# Altium PCB motor_borad.PcbDoc
Units mil, origin at the board's own origin, x right, y up, seen from the top; angles counter-clockwise.
Board outline 3900 x 3850 mil, 2 copper layers (Top Layer, Bottom Layer); 46 components, 103 nets, 394 pads, 120 vias.
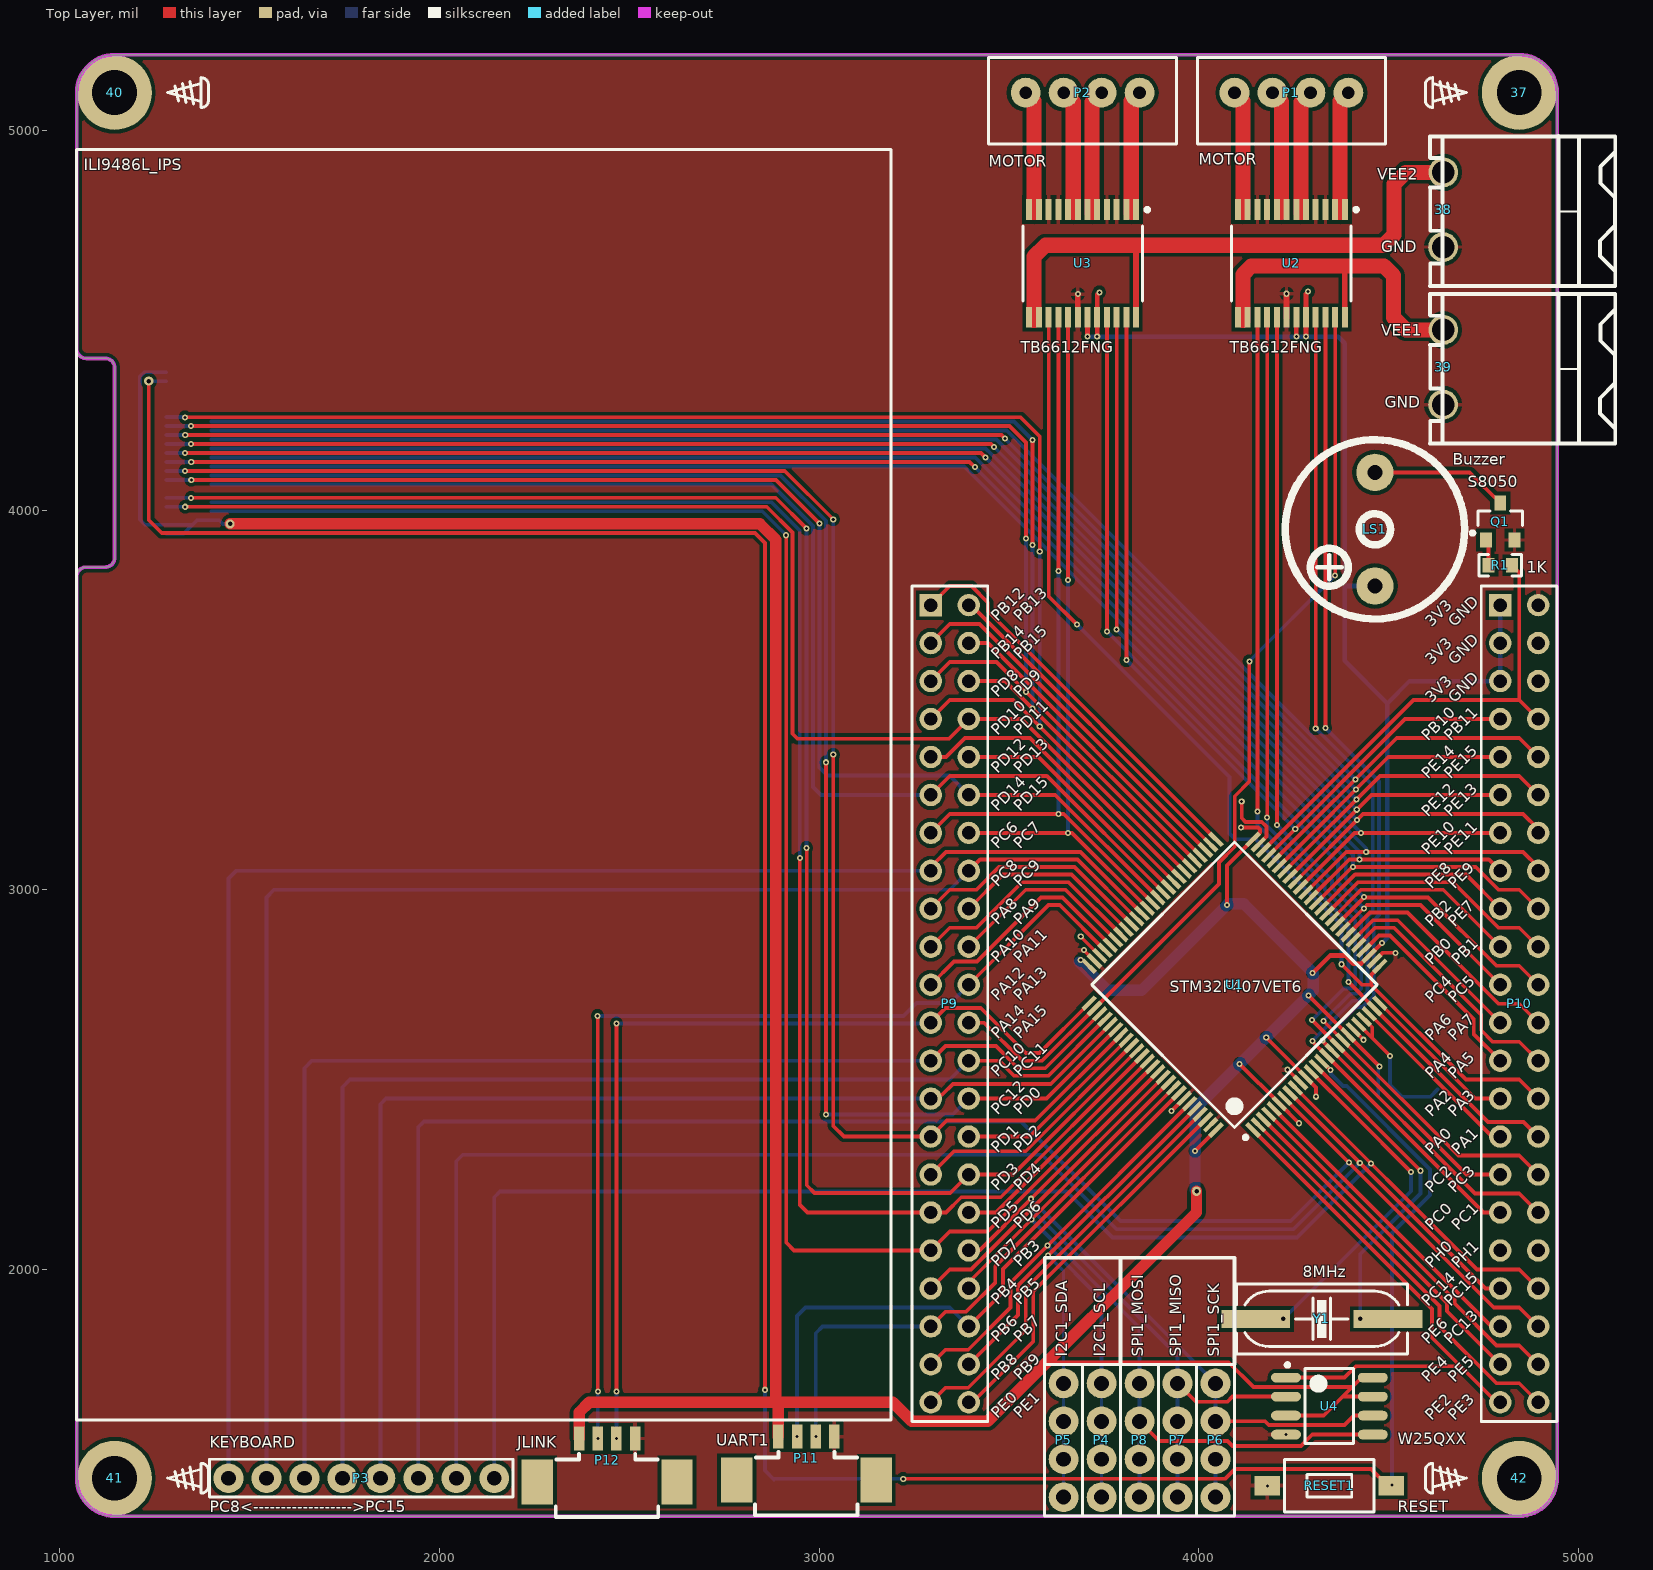
[diagram p0: Top Layer view]
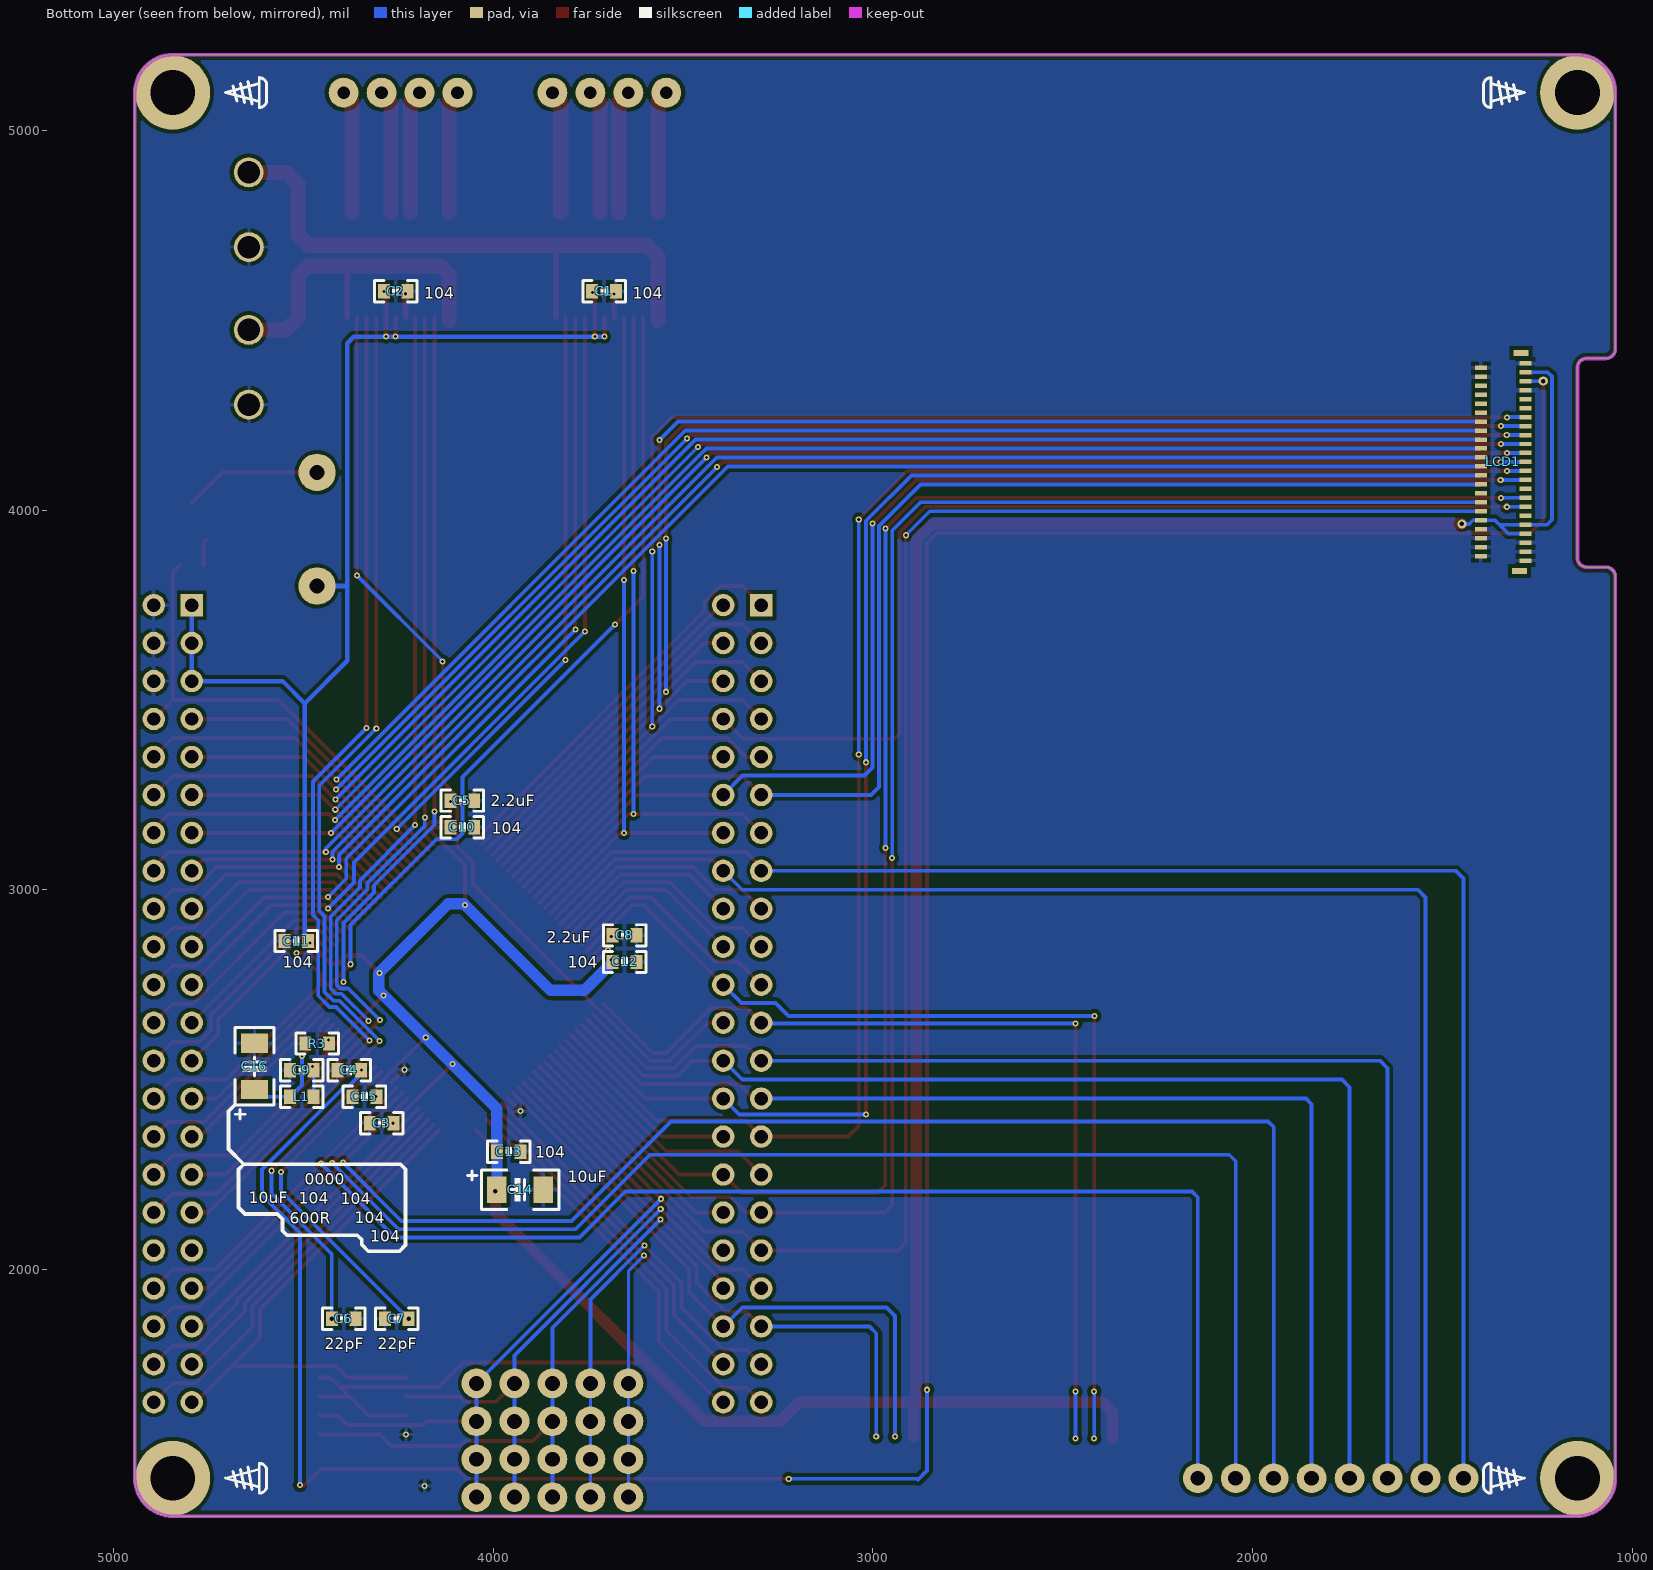
[diagram p1: Bottom Layer view, seen from below]

## Layer stack, top to bottom
Top Solder: solder mask 0.4, Solder Resist, Dk 3.5
Top Layer: signal copper 1.4
Dielectric 1: dielectric 12.6, FR-4, Dk 4.8
Bottom Layer: signal copper 1.4
Bottom Solder: solder mask 0.4, Solder Resist, Dk 3.5

## Board outline
1044,1450 1044,3825 cw(c1069,3825) 1069,3850 1119,3850 ccw(c1119,3875) 1144,3875 1144,4375 ccw(c1119,4375) 1119,4400 1069,4400 cw(c1069,4425) 1044,4425 1044,5100 cw(c1144,5100) 1144,5200 4844,5200 cw(c4844,5100) 4944,5100 4944,1450 cw(c4844,1450) 4844,1350 1144,1350 cw(c1144,1450)

## Design rules (kind name [scope] priority, off if disabled: settings)
Clearance Clearance_Polygon [InPolygon] p1: gap=10
Clearance [All] p2: gap=4
ComponentClearance [All] p1 off: gap=10 collisioncheckmode=3 verticalgap=10 showdistances=FALSE
PolygonConnect PolygonConnect_Polygon [InPolygon] p1: connectstyle=Direct reliefconductorwidth=10 reliefentries=4 polygonreliefangle="90 Angle" airgapwidth=10
PolygonConnect [All] p2: connectstyle=Relief reliefconductorwidth=10 reliefentries=4 polygonreliefangle="90 Angle" airgapwidth=10
RoutingTopology RoutingTopology_POWER [InNet('VCC')and InNet('GND')] p1: topology=Starburst
RoutingTopology [All] p2: topology=Shortest
RoutingVias [All] p1: holewidth=8 width=16 viastyle="Through Hole" minholewidth=8 minwidth=16 maxholewidth=28 maxwidth=50
SolderMaskExpansion [All] p1: expansion=4
Width [All] p1: maxlimit=50 minlimit=6 preferedwidth=10
28 further rules are at their usual default settings.

## Classes and differential pairs
component class stm32f407: C1 C2 C3 C4 C5 C6 C7 C8 C9 C10 C11 C12 C13 C14 C15 C16 L1 LCD1 LS1 P1 P2 P3 P4 P7 P8 P9 P10 P11 P12 Q1 R1 R3 RESET1 U1 U2 U3 U4 Y1

## Components (designator, comment, footprint, x,y, rotation, side; value= is the part's Value field where it differs from the comment)
37 "Comment" "Screw Hole" 4844,5100 r90 top
38 "Comment" KF2EDGK_2P 4644,4890 r270 top
39 "Comment" KF2EDGK_2P 4644,4475 r270 top
40 "Comment" "Screw Hole" 1144,5100 r270 top
41 "Comment" "Screw Hole" 1144,1450 r270 top
42 "Comment" "Screw Hole" 4844,1450 r90 top
C1 "104" C_0603 3708,4577 r0 bottom
C2 "104" C_0603 4257,4577 r0 bottom
C3 "104" C_0603 4294,2385 r180 bottom
C4 "104" C_0603 4379,2525 r180 bottom
C5 "2.2uF" C_0603 4081,3235 r180 bottom
C6 "22pF" C_0603 4394,1870 r0 bottom
C7 "22pF" C_0603 4254,1870 r180 bottom
C8 "2.2uF" C_0603 3654,2880 r180 bottom
C9 "104" C_0603 4504,2525 r180 bottom
C10 "104" C_0603 4081,3165 r0 bottom
C11 "104" C_0603 4519,2865 r180 bottom
C12 "104" C_0603 3654,2810 r0 bottom
C13 "104" C_0603 3959,2310 r0 bottom
C14 "10uF" TAC_3216 3929,2210 r180 bottom
C15 "104" C_0603 4339,2455 r180 bottom
C16 "10uF" TAC_3216 4629,2535 r90 bottom
L1 "600R" R_0603 4504,2455 r180 bottom
LCD1 "ILI9486L_IPS" ili9486l_裸屏 1044,4950 r0 top locked
LS1 "Buzzer" BEEP 4464,3950 r90 top
P1 "MOTOR" XH_4 4244,5100 r180 top
P2 "MOTOR" XH_4 3694,5100 r180 top
P3 "PC8<------------------>PC15" PIN_8 1794,1450 r0 top
P4 "I2C1_SCL" PIN_4 3744,1550 r90 top
P5 "I2C1_SDA" PIN_4 3644,1550 r90 top
P6 "SPI1_SCK" PIN_4 4044,1550 r90 top
P7 "SPI1_MISO" PIN_4 3944,1550 r90 top
P8 "SPI1_MOSI" PIN_4 3844,1550 r90 top
P9 "Header 22X2" HDR2X22 3294,3750 r270 top
P10 "Header 22X2" HDR2X22 4794,3750 r270 top
P11 "UART1" 1.25mm_4P 2969,1455 r0 top
P12 "JLINK" 1.25mm_4P 2444,1450 r0 top
Q1 "S8050" SOT_23_3 4794,3970 r0 top
R1 "1K" R_0603 4794,3855 r0 top
R3 "0000" R_0603 4464,2595 r180 bottom
RESET1 "RESET" "micro button_2_SMD" 4344,1430 r180 top
U1 "STM32F407VET6" LQFP100_V 4094,2750 r135 top locked
U2 "TB6612FNG" SSOP24 4244,4650 r270 top
U3 "TB6612FNG" SSOP24 3694,4650 r270 top
U4 "W25QXX" SOIC_8 4344,1640 r0 top
Y1 "8MHz" Crystal_HC_49USMD 4324,1870 r0 top

## Footprints (in the part's own frame and the unit in brackets; to place one, negate y for a bottom-side part, rotate by r counter-clockwise, add the part's x,y. Pads: shape width x height; smd on the part's side, far side on the other; paste and mask are expansions set on the pad)
1.25mm_4P [mm] "贴片卧式端子"
  rect 0.7x1.6 smd: 1(-1.942,2.658) 2(-0.692,2.658) 3(0.558,2.658) 4(1.808,2.658)
  rect 2.1x3 smd: 5(-4.742,-0.242) 5(4.608,-0.242)
  silkscreen extent -3.5,-2.6 3.35,1.63
BEEP [mm]
  round 2.5 hole 1: 1(-3.8,0) 2(3.8,0)
  silkscreen extent -6.01,-6 5.99,6, body extent -6,-6 6,6, height 9.61
C_0603 [mm]
  rect 0.8x0.96 smd: 1(-0.79,0) 2(0.79,0)
  silkscreen extent -1.42,-0.71 1.42,0.71, body extent -0.76,-0.39 0.76,0.39, height 0.9
Crystal_HC_49USMD [mm]
  rect 4.6x1.2 smd: 1(-4.428,0) 2(4.428,0)
  silkscreen extent -5.72,-2.36 5.72,2.34, body extent -6.1,-2.4 6.1,2.4, height 2.81
HDR2X22 [mm] "Connector; Header; 22x2 Position"
  rect 1.5x1.5 hole 0.9: 1(0,0)
  round 1.5 hole 0.9: 2(0,2.54) 3(2.54,0) 4(2.54,2.54) 5(5.08,0) 6(5.08,2.54) 7(7.62,0) 8(7.62,2.54) 9(10.16,0) 10(10.16,2.54) 11(12.7,0) 12(12.7,2.54) 13(15.24,0) 14(15.24,2.54) 15(17.78,0) 16(17.78,2.54) 17(20.32,0) 18(20.32,2.54) 19(22.86,0) 20(22.86,2.54) 21(25.4,0) 22(25.4,2.54) 23(27.94,0) 24(27.94,2.54) 25(30.48,0) 26(30.48,2.54) 27(33.02,0) 28(33.02,2.54) 29(35.56,0) 30(35.56,2.54) 31(38.1,0) 32(38.1,2.54) 33(40.64,0) 34(40.64,2.54) 35(43.18,0) 36(43.18,2.54) 37(45.72,0) 38(45.72,2.54) 39(48.26,0) 40(48.26,2.54) 41(50.8,0) 42(50.8,2.54) 43(53.34,0) 44(53.34,2.54)
  silkscreen extent -1.27,-1.27 54.61,3.81
ili9486l_裸屏 [mm]
  rect 1x0.4 smd far side: 0(6.3,-13.6) 0(6.4,-28.2)
  rect 0.8x0.3 smd far side: 1(6,-27.5) 2(9,-27.2) 3(6,-26.9) 4(9,-26.6) 5(6,-26.3) 6(9,-26) 7(6,-25.7) 8(9,-25.4) 9(6,-25.1) 10(9,-24.8) 11(6,-24.5) 12(9,-24.2) 13(6,-23.9) 14(9,-23.6) 15(6,-23.3) 16(9,-23) 17(6,-22.7) 18(9,-22.4) 19(6,-22.1) 20(9,-21.8) 21(6,-21.5) 22(9,-21.2) 23(6,-20.9) 24(9,-20.6) 25(6,-20.3) 26(9,-20) 27(6,-19.7) 28(9,-19.4) 29(6,-19.1) 30(9,-18.8) 31(6,-18.5) 32(9,-18.2) 33(6,-17.9) 34(9,-17.6) 35(6,-17.3) 36(9,-17) 37(6,-16.7) 38(9,-16.4) 39(6,-16.1) 40(9,-15.8) 41(6,-15.5) 42(9,-15.2) 43(6,-14.9) 44(9,-14.6) 45(6,-14.3)
  silkscreen extent 0,-85 54.5,0
KF2EDGK_2P [mm]
  round 2 hole 1.5: 1(0,0) 2(5,-0.013)
  silkscreen extent -2.43,-0.89 7.62,11.51
LQFP100_V [mm] "Thin QFP, 100-Leads, Body 14x14mm, Pitch 0.5mm, ST Recommended"
  rect 1.2x0.3 smd: 1(-7.75,6) 2(-7.75,5.5) 3(-7.75,5) 4(-7.75,4.5) 5(-7.75,4) 6(-7.75,3.5) 7(-7.75,3) 8(-7.75,2.5) 9(-7.75,2) 10(-7.75,1.5) 11(-7.75,1) 12(-7.75,0.5) 13(-7.75,0) 14(-7.75,-0.5) 15(-7.75,-1) 16(-7.75,-1.5) 17(-7.75,-2) 18(-7.75,-2.5) 19(-7.75,-3) 20(-7.75,-3.5) 21(-7.75,-4) 22(-7.75,-4.5) 23(-7.75,-5) 24(-7.75,-5.5) 25(-7.75,-6) 51(7.75,-6) 52(7.75,-5.5) 53(7.75,-5) 54(7.75,-4.5) 55(7.75,-4) 56(7.75,-3.5) 57(7.75,-3) 58(7.75,-2.5) 59(7.75,-2) 60(7.75,-1.5) 61(7.75,-1) 62(7.75,-0.5) 63(7.75,0) 64(7.75,0.5) 65(7.75,1) 66(7.75,1.5) 67(7.75,2) 68(7.75,2.5) 69(7.75,3) 70(7.75,3.5) 71(7.75,4) 72(7.75,4.5) 73(7.75,5) 74(7.75,5.5) 75(7.75,6)
  rect 0.3x1.2 smd: 26(-6,-7.75) 27(-5.5,-7.75) 28(-5,-7.75) 29(-4.5,-7.75) 30(-4,-7.75) 31(-3.5,-7.75) 32(-3,-7.75) 33(-2.5,-7.75) 34(-2,-7.75) 35(-1.5,-7.75) 36(-1,-7.75) 37(-0.5,-7.75) 38(0,-7.75) 39(0.5,-7.75) 40(1,-7.75) 41(1.5,-7.75) 42(2,-7.75) 43(2.5,-7.75) 44(3,-7.75) 45(3.5,-7.75) 46(4,-7.75) 47(4.5,-7.75) 48(5,-7.75) 49(5.5,-7.75) 50(6,-7.75) 76(6,7.75) 77(5.5,7.75) 78(5,7.75) 79(4.5,7.75) 80(4,7.75) 81(3.5,7.75) 82(3,7.75) 83(2.5,7.75) 84(2,7.75) 85(1.5,7.75) 86(1,7.75) 87(0.5,7.75) 88(0,7.75) 89(-0.5,7.75) 90(-1,7.75) 91(-1.5,7.75) 92(-2,7.75) 93(-2.5,7.75) 94(-3,7.75) 95(-3.5,7.75) 96(-4,7.75) 97(-4.5,7.75) 98(-5,7.75) 99(-5.5,7.75) 100(-6,7.75)
  silkscreen extent -7.87,-6.75 6.75,6.82, body extent -7,-7 7,7, height 1.6
"micro button_2_SMD" [mm]
  rect 1.7x1.3 smd: 1(-4.15,0) 2(4.15,0)
  silkscreen extent -3,-1.76 3,1.74, body extent -4.5,-1.75 4.5,1.75, height 4.51
PIN_4 [mm] "Connector; Header; 2 Position"
  round 2 hole 1: 1(-3.81,0) 2(-1.27,0) 3(1.27,0) 4(3.81,0)
  silkscreen extent -5.08,-1.27 5.08,1.27, body extent -5.08,-1.27 5.08,1.27, height 8.51
PIN_8 [mm]
  round 2 hole 1: 1(-8.89,0) 2(-6.35,0) 3(-3.81,0) 4(-1.27,0) 5(1.27,0) 6(3.81,0) 7(6.35,0) 8(8.89,0)
  silkscreen extent -10.16,-1.27 10.16,1.27, body extent -10.16,-1.27 10.16,1.27, height 8.51
R_0603 [mm]
  rect 0.8x0.96 smd: 1(-0.79,0) 2(0.79,0)
  silkscreen extent -1.42,-0.71 1.42,0.71, body extent -0.76,-0.38 0.76,0.38, height 0.41
"Screw Hole" [mm]
  round 5 hole 3: 1(0,0)
  silkscreen extent -1,3.54 1,6.29, body extent -2.6,-2.6 2.6,2.6, height 2.55
SOIC_8 [mm]
  oval 2x0.65 smd: 1(-2.906,1.905) 2(-2.906,0.635) 3(-2.906,-0.635) 4(-2.906,-1.905) 5(2.906,-1.905) 6(2.906,-0.635) 7(2.906,0.635) 8(2.906,1.905)
  silkscreen extent -2.93,-2.5 1.63,2.88, body extent -3,-2.5 3,2.5, height 1.8
SOT_23_3 [mm]
  rect 0.8x1 smd: 1(-0.95,-1.235) 2(0.95,-1.235) 3(0,1.235)
  silkscreen extent -1.98,-0.89 1.5,0.7, body extent -1.45,-1.19 1.45,1.19, height 1.02
SSOP24 [mm] "TSOP, 24-Leads, Body 7.80x5.60mm, Pitch 0.65mm, Thermal Pad 6.30x4.30mm, IPC Medium Density"
  rect 1.4x0.4 smd: 1(-3.6,3.575) 2(-3.6,2.925) 3(-3.6,2.275) 4(-3.6,1.625) 5(-3.6,0.975) 6(-3.6,0.325) 7(-3.6,-0.325) 8(-3.6,-0.975) 9(-3.6,-1.625) 10(-3.6,-2.275) 11(-3.6,-2.925) 12(-3.6,-3.575) 13(3.6,-3.575) 14(3.6,-2.925) 15(3.6,-2.275) 16(3.6,-1.625) 17(3.6,-0.975) 18(3.6,-0.325) 19(3.6,0.325) 20(3.6,0.975) 21(3.6,1.625) 22(3.6,2.275) 23(3.6,2.925) 24(3.6,3.575)
  silkscreen extent -3.72,-4 2.5,4.45, body extent -2.9,-4 2.9,4, height 1.6
TAC_3216 [mm]
  rect 1.3x1.8 smd: 1(-1.55,0) 2(1.55,0)
  silkscreen extent -3.52,-1.31 2.59,1.31, body extent -1.75,-0.8 1.75,0.8, height 1.6
XH_4 [mm]
  round 2 hole 0.85: 1(-3.81,0) 2(-1.27,0) 3(1.27,0) 4(3.81,0)
  silkscreen extent -6.29,-2.35 6.29,3.45, body extent -6.29,-2.35 6.29,3.45, height 7.2

## Part data
C1 C2 C3 C4 C5 C6 C7 C8 C9 C10 C11 C12 C13 C15: library part Cap, "Capacitor"
C14 C16: library part "Cap Pol1", "Polarized Capacitor (Radial)"
L1: library part Inductor, "Inductor"
LCD1: library part TFT_3.5_Tiky_ODM
LS1: "Magnetic Transducer Buzzer"
P1 P2 P4 P5 P6 P7 P8 P11 P12: library part "Header 4", "Header, 4-Pin"
P3: library part "Header 8", "Header, 8-Pin"
P9 P10: "Header, 22-Pin, Dual row"
Q1: library part QNPN, "NPN Bipolar Transistor"
R1 R3: library part Res2, "Resistor"
RESET1: library part SW-PB, "Switch"
U1: "ARM Cortex-M4 32b MCU+FPU, 210DMIP, 512 kB Flash, 192+4 kB RAM, Camera, 82 I/Os, 100-pin LQFP, -40 to +85癈, Tray"
U2 U3: "DC_MOTOR_DRIVER"
U4: library part W25X16, "W25X16;SST25VF016;MX25L1605"
Y1: library part XTAL, "Crystal Oscillator"

## Via types
v1: diameter 16, hole 8, Top Layer to Bottom Layer, 115 vias
v2: diameter 24, hole 12, Top Layer to Bottom Layer, 3 vias
v3: diameter 20, hole 12, Top Layer to Bottom Layer, 2 vias

## Nets (pads, with @x,y where several pads share a name; then routed paths per layer and width w, separated by ;. In a path a pad name is that pad's centre, name@x,y a point inside that pad or via, vN(x,y) a via of type N, cw(c..) or ccw(c..) an arc to the next point about the centre after c; other vN are vias at no path point)
BEEP: P10.8 R1.2 U1.48 | length 1270.6
  Top Layer w10: U1.48 4565.61,3500 4844,3500 ; R1.2 4844,3836.1 4844,3500 ; P10.8 4844,3500
FLASH_CS: P10.43 U1.1 U4.1 | length 1464.7
  Top Layer w10: U1.1 4614,1895.93 4614,1820 4689,1745 ; U4.1 4384,1715 4414,1745 4689,1745 ; P10.43 4784,1650 4689,1745
FSMC_D0: LCD1.18 P9.11 U1.61 | length 3396.7
  Top Layer w10: P9.11 3344,3300 3599.68,3300 U1.61
  Bottom Layer w10: LCD1.18 2873.93,4068.11 2984,3958.04 2984,3271 3005,3250 P9.11
FSMC_D1: LCD1.19 P9.12 U1.62 | length 3444.3
  Top Layer w10: v1(1345.92,4079.92) 2886.08,4079.92 v1(3001,3965) ; P9.12 3621.84,3250 U1.62
  Bottom Layer w10: LCD1.19 v1(1345.92,4079.92) ; v1(3001,3965) 3001,3322 3022,3301 3343,3301 P9.12
FSMC_D2: LCD1.20 P9.28 U1.81 | length 4088.8
  Top Layer w10: v1(3018,2408) v1(3018,3336) ; P9.28 3599.13,2450 U1.81
  Bottom Layer w10: LCD1.20 2898.31,4091.73 3018,3972.04 v1(3018,3336) ; v1(3018,2408) 3352,2408 P9.28
FSMC_D3: LCD1.21 P9.29 U1.82 | length 4287.9
  Top Layer w10: v1(1329.54,4103.54) 2909.46,4103.54 v1(3037,3976) ; v1(3037,3356) 3037,2378 3065,2350 P9.29 3336,2392 3568.97,2392 U1.82
  Bottom Layer w10: LCD1.21 v1(1329.54,4103.54) ; v1(3037,3356) v1(3037,3976)
FSMC_D4: LCD1.22 P10.18 U1.38 | length 4132.1
  Top Layer w10: U1.38 4404,3060 v1(4406,3060) 4729.51,3060 4789.51,3000 4844,3000 P10.18
  Bottom Layer w10: LCD1.22 3382.12,4115.35 4406,3091.48 v1(4406,3060)
FSMC_D5: LCD1.23 P10.15 U1.39 | length 4140.6
  Top Layer w10: v1(1345.83,4127.17) 3396.17,4127.17 v1(3410,4113.33) ; U1.39 4396.16,3080 v1(4423,3080) 4764,3080 P10.15
  Bottom Layer w10: LCD1.23 v1(1345.83,4127.17) ; v1(3410,4113.33) 4423,3100.33 v1(4423,3080)
FSMC_D6: LCD1.24 P10.16 U1.40 | length 4161
  Top Layer w10: U1.40 4388.32,3100 v1(4441,3100) 4854,3100 4894,3060 P10.16
  Bottom Layer w10: LCD1.24 3411.02,4138.98 4441,3109 v1(4441,3100)
FSMC_D7: LCD1.25 P10.13 U1.41 | length 4146.4
  Top Layer w10: v1(1329.21,4150.79) 3426.21,4150.79 v1(3438,4139) ; U1.41 4410.48,3150 v1(4427,3150) P10.13
  Bottom Layer w10: LCD1.25 v1(1329.21,4150.79) ; v1(3438,4139) v1(4427,3150)
FSMC_D8: LCD1.26 P10.14 U1.42 | length 4164.5
  Top Layer w10: U1.42 4432.64,3200 4854,3200 4894,3160 P10.14
  Bottom Layer w10: LCD1.26 3438.44,4162.6 3455,4146.04 ; 3455,4146 v1(4417,3184)
FSMC_D9: LCD1.27 P10.11 U1.43 | length 4177.6
  Top Layer w10: v1(1345.59,4174.41) 3452.59,4174.41 v1(3461,4166) ; U1.43 4454.81,3250 P10.11
  Bottom Layer w10: LCD1.27 v1(1345.59,4174.41) ; v1(3461,4166) v1(4416,3211)
FSMC_D10: LCD1.28 P10.12 U1.44 | length 4201.8
  Top Layer w10: U1.44 4476.97,3300 4844,3300 P10.12
  Bottom Layer w10: LCD1.28 3466.78,4186.22 v1(4415,3238)
FSMC_D11: LCD1.29 P10.9 U1.45 | length 4221.2
  Top Layer w10: v1(1330,4198) 3480,4198 v1(3489,4189) ; U1.45 4499.13,3350 P10.9
  Bottom Layer w10: LCD1.29 v1(1330,4198) ; v1(3489,4189) v1(4414,3264)
FSMC_D12: LCD1.30 P10.10 U1.46 | length 4245.3
  Top Layer w10: U1.46 4521.29,3400 4844,3400 P10.10
  Bottom Layer w10: LCD1.30 3494.16,4209.84 v1(4413,3291)
FSMC_D13: LCD1.31 P9.5 U1.55 | length 3872.1
  Top Layer w10: v1(1345.65,4221.65) 3501.35,4221.65 3545,4178 v1(3545,3925) ; P9.5 3344,3600 3466.71,3600 v1(3545,3521.71) U1.55
  Bottom Layer w10: LCD1.31 v1(1345.65,4221.65) ; v1(3545,3521.71) v1(3545,3925)
FSMC_D14: LCD1.32 P9.6 U1.56 | length 3675.3
  Top Layer w10: P9.6 3489.25,3550 3975.68,3063.57 U1.56 ; v1(3562,3908) v1(3562,4185)
  Bottom Layer w10: LCD1.32 3513.54,4233.46 v1(3562,4185) ; v1(3562,3477) v1(3562,3908)
FSMC_D15: LCD1.33 P9.7 U1.57 | length 3961
  Top Layer w10: v1(1329.28,4244.72) 3530.28,4244.72 3581,4194 v1(3581,3891) ; P9.7 3344,3500 3511.03,3500 U1.57
  Bottom Layer w10: LCD1.33 v1@1329.28,4245.28 ; v1(3581,3430) v1(3581,3891)
GND: 38.2 39.2 C1.1 C2.1 C3.1 C4.1 C5.2 C6.1 C7.1 C8.2 C9.1 C10.1 C11.1 C12.1 C13.1 C14.2 C15.1 C16.2 LCD1.1 LCD1.2 LCD1.3 LCD1.4 LCD1.5 LCD1.6 LCD1.8 LCD1.39 LCD1.42 LCD1.44 LCD1.45 P10.2 P10.4 P10.6 P11.4 P12.4 Q1.2 R3.1 RESET1.2 U1.10 U1.27 U1.74 U1.94 U1.99 U2.3 U2.4 U2.9 U2.10 U2.18 U3.3 U3.4 U3.9 U3.10 U3.18 U4.4 | length 326.7
  Top Layer w10: v1(3697,2841) 3697,2840.77 U1.74 ; v1(3928.03,2417) U1.94 ; v1(4234,2526) 4234.48,2526 U1.10 ; U1.27 4484.23,2834 v1(4518,2834)
  Top Layer w15: U3.18 v1(3681.2,4569.2) ; U2.18 v1(4231.2,4570.2)
  Bottom Layer w15: v1(3681.2,4569.2) 3682,4570 C1.1@3682,4571.9 ; v1(4231.2,4570.2) 4232,4571 C2.1@4231.9,4571
  other v1: 4180.61,1430 4229.57,1565
I2C1_SCL: P4.1 P4.2 P4.3 P4.4 P9.41 U1.95 | length 1726.2
  Top Layer w10: P9.41 3332.53,1788.53 3392.53,1788.53 3504,1900 3504,1965.13 v1(3601.87,2063) U1.95
  Bottom Layer w8: P4.1 P4.2 P4.3 P4.4
  Bottom Layer w10: v1(3601.87,2063) 3744,1920.87 P4.4
I2C1_SDA: P5.1 P5.2 P5.3 P5.4 P9.42 U1.96 | length 1572.9
  Top Layer w10: P9.42 3524,1880 3524,1957.29 U1.96
  Bottom Layer w8: v1(3603,2036.29) 3644,1995.29 P5.4 P5.3 P5.2 P5.1
LCD_CS: LCD1.12 P9.35 U1.88 | length 4578.4
  Top Layer w10: v1(2913,3934) 2913,2071 2934,2050 P9.35 3344,2100 3444,2100 U1.88
  Bottom Layer w10: LCD1.12 2849.76,3997.24 v1(2913,3934)
LCD_RD: LCD1.15 P9.32 U1.85 | length 4475.9
  Top Layer w10: v1(1345.68,4032.68) 2885.32,4032.68 v1(2966.5,3951.5) ; v1@2967,3110.5 2967,2222 2988,2201 3345,2201 P9.32 ; P9.32@3401,2250 3510.48,2250 U1.85
  Bottom Layer w10: LCD1.15 v1(1345.68,4032.68) ; v1(2966.5,3110.5) v1(2966.5,3951.5)
LCD_RS: LCD1.13 P9.8 U1.58 | length 3424.5
  Top Layer w10: v1(1329.94,4009.06) 2861.99,4009.06 2930,3941.04 2930,3411 2943,3398 3342,3398 P9.8 3533.19,3450 U1.58
  Bottom Layer w10: LCD1.13 v1(1329.94,4009.06)
LCD_WR: LCD1.14 P9.33 U1.86 | length 4438.1
  Top Layer w10: v1(2949,3084) 2949,2170 2969,2150 P9.33 3334,2150 3374,2190 3478.32,2190 U1.86
  Bottom Layer w10: LCD1.14 2874.13,4020.87 2949,3946 v1(2949,3084)
M1_IN1: P10.33 U1.15 U2.21 | length 2726.6
  Top Layer w10: v1(4299,2601.96) 4299,2600.68 U1.15 4749.68,2150 P10.33 ; v1(4307.98,3425.02) U2.21
  Bottom Layer w10: v1(4299,2601.96) 4405.04,2708 4421,2708 4444,2731 4444,2930 4458,2944 4458,3275 v1(4307.98,3425.02)
M1_IN2: P10.34 U1.16 U2.22 | length 2792
  Top Layer w10: v1(4326,2603) 4326,2601.52 U1.16 4727.52,2200 4844,2200 P10.34 ; v1(4333.57,3426.43) U2.22
  Bottom Layer w10: v1(4326,2603) 4414,2691 4431,2691 4461,2721 4461,2920 4475,2934 4475,3285 v1(4333.57,3426.43)
M2_IN1: P10.32 U1.18 U2.17 | length 2729.3
  Top Layer w10: v1(4205.61,3170.39) U2.17 ; v1(4328,2655) 4379.15,2603.85 U1.18 4683.19,2300 4844,2300 P10.32
  Bottom Layer w10: v1(4205.61,3170.39) 4351,3025 4351,3007 4428,2930 4428,2740 4414,2726 4399,2726 v1(4328,2655)
M2_IN2: P10.31 U1.17 U2.16 | length 2672
  Top Layer w10: v1(4180.02,3190.98) U2.16 ; v1(4298,2657) 4365.07,2589.93 U1.17 4705.36,2250 P10.31
  Bottom Layer w10: v1(4180.02,3190.98) 4180.02,3168.98 4332,3017 4332,3000 4412,2920 4412,2749 4403,2740 4382,2740 4299,2657 v1(4298,2657)
M3_IN1: P10.21 U1.33 U3.21 | length 2353.6
  Top Layer w10: v1(3757.98,3681.02) U3.21 ; U1.33 v1@4434.6,2951.4 ; 4443.19,2960 4584,2960 P10.21
  Bottom Layer w10: v1(3757.98,3681.02) 4367,3072 4367,3019 v1(4435,2951)
M3_IN2: P10.22 U1.34 U3.22 | length 2450.4
  Top Layer w10: v1(3783.57,3685.57) U3.22 ; U1.34 4435.36,2980 4604,2980 4784,2800 4844,2800 P10.22
  Bottom Layer w10: v1(3783.57,3685.57) 4387,3082.13 4387,3029 v1(4435.36,2980.64)
M4_IN1: P9.14 U1.64 U3.17 | length 1911.3
  Top Layer w10: P9.14 3666.16,3150 U1.64 ; v1(3655.61,3816.39) U3.17
  Bottom Layer w10: v1(3655.61,3149.39) v1(3655.61,3816.39)
M4_IN2: P9.13 U1.63 U3.16 | length 2010.2
  Top Layer w10: P9.13 3344,3200 3644,3200 U1.63 ; v1(3630.02,3840.02) U3.16
  Bottom Layer w10: v1(3630.02,3200.02) v1(3630.02,3840.02)
NetC5_1: C5.1 U1.49 | length 175.1
  Top Layer w10: v1(4113,3233) 4113,3189 4123,3179 4166,3179 4178,3167 4178,3140.23 U1.49
NetC6_2: C6.2 U1.13 Y1.2 | length 843.7
  Top Layer w10: U1.13 v1(4584,2260)
  Bottom Layer w10: v3(4425.1,1870) 4425.1,2041.1 4584,2200 v1(4584,2260)
NetC7_2: C7.2 U1.12 Y1.1 | length 898.6
  Top Layer w10: U1.12 4295.83,2520.17 4404,2412 v1(4559,2257)
  Bottom Layer w10: v3(4222.9,1870) 4559,2206.1 v1(4559,2257)
NetC8_1: C8.1 U1.73 | length 78.1
  Top Layer w10: v1(3689,2876.61) U1.73
  Bottom Layer w10: C8.1 3689,2880 v1(3689,2876.61)
NetC16_1: C16.1 L1.1 U1.21 U1.22 | length 398.1
  Top Layer w10: U1.21 4456.71,2610 ; U1.22 4456.71,2637.84 4456.71,2610 ; v1(4504,2562.71) 4456.71,2610
  Bottom Layer w10: v1(4504,2562.71) 4504,2486.1 L1.1 4610.04,2455 C16.1
NetLS1_2: LS1.2 Q1.3 | length 363.5
  Top Layer w10: LS1.2 4713.02,4099.61 Q1.3
NetP1_1: P1.1 U2.1 U2.2 | length 325.1
  Top Layer w40: 4372,4784 4372,5078 P1.1
NetP1_2: P1.2 U2.5 U2.6 | length 326.4
  Top Layer w40: 4269,4784 4269,5075 P1.2
NetP1_3: P1.3 U2.7 U2.8 | length 325.9
  Top Layer w40: P1.3 4218,5076 4218,4784
NetP1_4: P1.4 U2.11 U2.12 | length 325.1
  Top Layer w40: P1.4 4116,5078 4116,4784
NetP2_1: P2.1 U3.1 U3.2 | length 325.1
  Top Layer w40: 3822,4784 3822,5078 P2.1
NetP2_2: P2.2 U3.5 U3.6 | length 326.4
  Top Layer w40: 3719,4784 3719,5075 P2.2
NetP2_3: P2.3 U3.7 U3.8 | length 326.4
  Top Layer w40: P2.3 3669,5075 3669,4784
NetP2_4: P2.4 U3.11 U3.12 | length 325.1
  Top Layer w40: P2.4 3566,5078 3566,4784
NetQ1_1: Q1.1 R1.1 | length 69
  Top Layer w10: Q1.1 4762.9,3915.08 R1.1
NetR3_2: R3.2 U1.20 | length 38
  Top Layer w10: U1.20 4434,2604.87 v1(4434,2605)
PA0: P10.29 U1.23 | length 479
  Top Layer w10: U1.23 4772.39,2350 P10.29
PA1: P10.30 U1.24 U2.15 | length 2519.5
  Top Layer w10: v1(4154.43,3206.43) U2.15 ; v1(4394,2757) 4462.86,2688.14 U1.24 4761.7,2388.53 4855.47,2388.53 P10.30
  Bottom Layer w10: v1(4154.43,3206.43) 4154.43,3171.57 4314,3012 4314,2993 4394,2913 v1(4394,2757)
PA2: P10.27 U1.25 | length 421.3
  Top Layer w10: U1.25 4728.07,2450 P10.27
PA3: P10.28 U1.26 U3.15 | length 2777.9
  Top Layer w10: U3.15 3604.43,3773.57 v1(3679,3699) ; v1(4376,2804) 4430,2750 4454,2750 ; U1.26 4454,2775.93 4454,2750 ; P10.28 4844,2500 4704,2500 4454,2750
  Bottom Layer w10: v1(3679,3699) 4081,3297 4081,3148.73 4096.73,3133 4150,3133 4376,2907 v1(4376,2804)
PA4: P10.25 U1.29 | length 535.5
  Top Layer w10: U1.29 4474.55,2880 4504,2880 4724,2660 4724,2620 P10.25
PA5: P10.26 U1.30 | length 661.7
  Top Layer w10: U1.30 4421.11,2856.91 4464.2,2900 4514,2900 4744,2670 4744,2630 4774,2600 4844,2600 P10.26
PA6: P10.23 U1.31 | length 520.1
  Top Layer w10: U1.31 4458.87,2920 4524,2920 P10.23
PA7: P10.24 U1.32 | length 644.8
  Top Layer w10: U1.32 4451.03,2940 4549.51,2940 4789.51,2700 4844,2700 P10.24
PA8: P9.17 U1.67 | length 636.2
  Top Layer w10: P9.17 3344,3000 3414,3000 3474,3060 3672.64,3060 U1.67
PA9: P9.18 U1.68 | length 511.5
  Top Layer w10: P9.18 3484,3040 3664.81,3040 U1.68
PA10: P9.19 U1.69 | length 628.2
  Top Layer w10: P9.19 3344,2900 3414,2900 3534,3020 3656.97,3020 U1.69
PA11: P9.20 U1.70 | length 503.5
  Top Layer w10: P9.20 3544,3000 3649.13,3000 U1.70
PA12: P9.21 U1.71 | length 620.2
  Top Layer w10: P9.21 3355.47,2811.47 3415.47,2811.47 3584,2980 3641.29,2980 U1.71
PA13: P9.22 P12.2 U1.72 | length 2621.1
  Top Layer w10: v1(2416,2668) 2416.76,2667.24 v1(2416.76,1678.76) ; P9.22 3604,2960 3633.45,2960 U1.72
  Bottom Layer w10: v1(2416,2668) 3222,2668 3256,2702 3346,2702 P9.22 ; v1(2416.76,1554.65) v1(2416.76,1678.76)
PA14: P9.23 P12.3 U1.76 | length 2458.8
  Top Layer w10: v1(2465.97,1677.97) v1(2465.97,2647.97) ; P9.23 3332.53,2688.53 3425.47,2688.53 3544,2570 3579.93,2570 U1.76
  Bottom Layer w10: v1(2465.97,1554.65) v1(2465.97,1677.97) ; v1(2465.97,2647.97) 3291.97,2647.97 P9.23
PA15: P9.24 U1.77 U2.23 | length 2513.1
  Top Layer w10: P9.24 3434,2650 3534,2550 3587.77,2550 U1.77 4053,3015.23 4053,3072 4094.5,3113.5 4094.5,3246.5 4133,3285 v1(4133,3602) ; v1(4359.16,3828) U2.23
  Bottom Layer w10: v1(4133,3602) v1@4359.16,3828.16
PB0: P10.19 U1.35 | length 536.1
  Top Layer w10: U1.35 4427.52,3000 4644,3000 P10.19
PB1: P10.20 U1.36 | length 660.8
  Top Layer w10: U1.36 4419.68,3020 4669.51,3020 4789.51,2900 4844,2900 P10.20
PB2: P10.17 U1.37 | length 544.1
  Top Layer w10: U1.37 4411.84,3040 4704,3040 P10.17
PB3: P6.1 P6.2 P6.3 P6.4 P9.36 U1.89 U4.6 | length 2109.4
  Top Layer w10: P9.36 3421.84,2050 v1(3558,2186.16) U1.89 ; P6.3 4174,1600 4184,1590 4384,1590 4409,1615 U4.6
  Bottom Layer w10: v1(3558,2186.16) 3558,2186 P6.4 P6.3 P6.2 P6.1
PB4: P7.1 P7.2 P7.3 P7.4 P9.37 U1.90 U4.2 | length 2090.7
  Top Layer w10: P9.37 3344,2000 3399.68,2000 3545.68,2146 ; v1(3558.68,2159) 3545.68,2146 ; U1.90 3545.68,2146 ; P7.4 3992.37,1651.63 4075.63,1651.63 4089,1665 U4.2
  Bottom Layer w10: v1(3558.68,2159) 3944,1773.68 P7.4 P7.3 P7.2 P7.1
PB5: P8.1 P8.2 P8.3 P8.4 P9.38 U1.91 U4.5 | length 2263.7
  Top Layer w10: P9.38 3394,1966.48 U1.91 ; P8.3 3895.63,1548.37 4075.63,1548.37 4089,1535 4269,1535 4299,1565 U4.5
  Bottom Layer w10: v1(3559,2131.48) 3844,1846.48 P8.4 P8.3 P8.2 P8.1
PB6: P9.39 P11.3 U1.92 | length 1508.4
  Top Layer w10: P9.39 3332.53,1888.53 3387.01,1888.53 3464,1965.51 3464,2008.64 U1.92
  Bottom Layer w10: v1(2990.97,1559.65) 2990.97,1831.97 3009,1850 P9.39
PB7: P9.40 P11.2 U1.93 | length 1644.3
  Top Layer w10: P9.40 3484,1940 3484,2000.81 U1.93
  Bottom Layer w10: v1(2941.76,1559.65) 2941.76,1877.76 2964,1900 3344,1900 P9.40
PB10: P10.7 U1.47 U3.23 | length 2290.4
  Top Layer w10: v1(3809.16,3605.16) U3.23 ; U1.47 4543.45,3450 P10.7
  Bottom Layer w10: v1(3809.16,3605.16) v1(4254,3160.31)
PB12: P9.1 U1.51 | length 1062
  Top Layer w10: P9.1 3344,3800 3401.31,3800 3444,3757.31 3444,3734.07 U1.51
PB13: P9.2 U1.52 | length 898.8
  Top Layer w10: P9.2 3400.23,3750 U1.52
PB14: P9.3 U1.53 | length 990.6
  Top Layer w10: P9.3 3344,3700 3422.39,3700 U1.53
PB15: P9.4 U1.54 | length 841.1
  Top Layer w10: P9.4 3444.55,3650 U1.54
PC8: P3.1 P9.15 U1.65 | length 4088.4
  Top Layer w10: P9.15 3294,3060 3334,3100 3688.32,3100 U1.65
  Bottom Layer w10: P3.1 1444,3030 1464,3050 P9.15
PC9: P3.2 P9.16 U1.66 | length 3928.5
  Top Layer w10: P9.16 3424,3080 3680.48,3080 U1.66
  Bottom Layer w10: P3.2 1544,2980 1564,3000 3344,3000 P9.16
PC10: P3.3 P9.25 U1.78 | length 3283
  Top Layer w10: P9.25 3332.53,2588.53 3465.47,2588.53 3524,2530 3595.61,2530 U1.78
  Bottom Layer w10: P3.3 1644,2530 1664,2550 P9.25
PC11: P3.4 P9.26 U1.79 | length 3146.5
  Top Layer w10: P9.26 3474,2550 3514,2510 3603.45,2510 U1.79
  Bottom Layer w10: P3.4 1744,2480 1764,2500 3344,2500 P9.26
PC12: P3.5 P9.27 U1.80 | length 3001
  Top Layer w10: P9.27 3294,2460 3323.8,2460 3352.33,2488.53 3609.82,2488.53 U1.80
  Bottom Layer w10: P3.5 1844,2435 1859,2450 P9.27
PC13: P3.6 P10.40 U1.7 | length 4472.1
  Top Layer w10: U1.7 4776.97,1900 4844,1900 P10.40
  Bottom Layer w10: P3.6 1944,2375 1959,2390 3532,2390 3794,2128 4242,2128 v1(4396,2282)
PC14: P3.7 P10.37 U1.8 | length 4142.7
  Top Layer w10: U1.8 4754.81,1950 P10.37
  Bottom Layer w10: P3.7 2044,2285 2061,2302 3587,2302 3783,2106 4249.19,2106 v1(4424,2280.81)
PC15: P3.8 P10.38 U1.9 | length 4045.6
  Top Layer w10: U1.9 4732.64,2000 4844,2000 P10.38
  Bottom Layer w10: P3.8 2144,2190 2159,2205 3652,2205 3773,2084 4258.64,2084 v1(4453.64,2279)
PD2: P9.30 U1.83 | length 519.8
  Top Layer w10: P9.30 3554.81,2350 U1.83
PD3: P9.31 U1.84 | length 669.4
  Top Layer w10: P9.31 3355.47,2311.47 3544.12,2311.47 U1.84
PD6: P9.34 U1.87 | length 635.3
  Top Layer w10: P9.34 3466.16,2150 U1.87
PD12: P9.9 U1.59 | length 817.4
  Top Layer w10: P9.9 3334,3350 3384,3400 3555.36,3400 U1.59
PD13: P9.10 U1.60 | length 667.9
  Top Layer w10: P9.10 3577.52,3350 U1.60
PE0: P9.43 U1.97 | length 1088
  Top Layer w10: P9.43 3332.53,1688.53 3392.53,1688.53 3544,1840 3544,1949.45 U1.97
PE1: P9.44 U1.98 | length 1009
  Top Layer w10: P9.44 3403.8,1650 3564,1810.2 3564,1941.61 U1.98
PE3: P10.44 U1.2 | length 1071.7
  Top Layer w10: U1.2 4634,1903.77 4634,1850 4784,1700 4844,1700 P10.44
PE4: P10.41 U1.3 | length 903.3
  Top Layer w10: U1.3 4654,1911.61 4654,1890 P10.41
PE5: P10.42 U1.4 | length 988
  Top Layer w10: U1.4 4674,1919.45 4674,1910 4784,1800 4844,1800 P10.42
PE6: P10.39 U1.5 | length 832.9
  Top Layer w10: U1.5 4771.29,1850 P10.39
PH0: P10.35
PH1: P10.36
RESET: C4.2 LCD1.41 RESET1.1 U1.14 | length 7475.6
  Top Layer w10: v2(1234,4340) 1234,3974 1268,3940 2831,3940 2857,3914 v1(2857,1683) ; v1(3221.37,1448.37) 4069.37,1448.37 4095,1474 4454,1474 4498,1430 RESET1.1 ; U1.14 v1(4346.84,2525)
  Bottom Layer w10: v2(1234,4340) 1234.24,4339.76 LCD1.41 ; v1(2857,1683) 2857,1470 2881,1446 2883.37,1448.37 v1(3221.37,1448.37) ; C4.2 4347.9,2515.1 4380.1,2482.9 4389.58,2482.9 4609,2263.48 4609,2196 4509,2096 v1(4509,1431.61)
VCC: C1.2 C2.2 C3.2 C9.2 C10.2 C11.2 C12.2 C13.2 C14.1 C15.2 L1.2 LCD1.7 LCD1.9 LCD1.10 LCD1.43 LS1.1 P10.1 P10.3 P10.5 P11.1 P12.1 U1.6 U1.11 U1.19 U1.28 U1.50 U1.75 U1.100 U2.19 U2.20 U3.19 U3.20 U4.3 U4.7 U4.8 | length 13924.2
  Top Layer w10: 3599,1755 4079,1755 4144,1690 4404,1690 ; v1(3990.1,2312.04) U1.100 ; v1(4074,2960) 4074,3064.07 U1.50 4161,3151.07 4161,3159 4156,3164 v1(4111.5,3164) ; v1(4107.56,2541.56) U1.6 v1(4264,2385.13) ; v1(4177.66,2610.66) U1.11 4309,2479.32 v1(4309,2455) ; U4.3 4329,1615 4379,1665 ; v1(4289.02,2722.02) U1.19 v1(4476.03,2535) ; U4.7 4379,1665 ; U4.8 4429,1715 4404,1690 ; 4379,1665 4404,1690
  Top Layer w12: v1(3706.8,4457.2) U3.19 ; v1(3732.39,4457.39) U3.20 3732.39,4568.39 v1(3738,4574) ; v1(4256.8,4457.2) U2.19 ; v1(4282.39,4457.39) U2.20 4282.39,4570.39 v1(4288,4576) ; v1(4300,2781) 4346,2827 4385,2827 4407,2805 4427.39,2805 U1.28 v1(4482.39,2860)
  Top Layer w30: v2(1448,3964) 2844,3964 2886,3922 2886,1656.54 ; P12.1 2367.54,1623.54 2394,1650 2892.54,1650 ; P11.1 2892.54,1650 ; v2(3994,2206.04) 3994,2150 3444,1600 3244,1600 3194,1650 2892.54,1650
  Bottom Layer w10: LCD1.7 1325.19,3938.19 1348.81,3961.81 ; LCD1.43 1222.39,4363.39 1211,4352 1211,3975 1224.19,3961.81 LCD1.9 1348.81,3961.81 ; v2(1448,3964) 1429,3964 1419.38,3973.62 LCD1.10 1360.62,3973.62 1348.81,3961.81 ; C10.2@4111.1,3164 v1(4111.5,3164) ; L1.2 C9.2
  Bottom Layer w12: v1(3706.8,4457.2) 3707,4457 v1@4282,4457 ; v1(4282.39,4457.39) v1@4282,4457 ; LS1.1 4384.39,3800.39 4384,3800 ; C11.2 4496,2873.1 4496,3491 ; P10.1 P10.3 P10.5 4555,3550 4496,3491 ; v1@4282,4457 4367,4457 4384,4440 4384,3800 ; 4384,3800 4384,3603 4496,3491
  Bottom Layer w30: C12.2 3760.1,2735 3849,2735 4077,2963 4119,2963 v1@4300.5,2781.5 ; v2(3994,2206.04) C14.1 3990.04,2309.94 C13.2 v1(3990.1,2312.04) 3990.1,2423.1 4301,2734 v1@4301,2781
  other v1: 3689,2815
VEE1: 39.1 U2.13 U2.14 U2.24 | length 927
  Top Layer w15: U2.24 4384.75,4642.75 4385,4643
  Top Layer w40: 4116,4500 4116,4621 4138,4643 4385,4643 4488,4643 4513,4618 4513,4508 4546,4475 39.1
VEE2: 38.1 U3.13 U3.14 U3.24 | length 1606.5
  Top Layer w15: 3834,4698 3834.75,4697.25 U3.24
  Top Layer w40: 3566,4500 3566,4668 3596,4698 3834,4698 4487,4698 4514,4725 4514,4859 4545,4890 38.1
pads on no net: 37.1 40.1 41.1 42.1 LCD1.0 LCD1.11 LCD1.16 LCD1.17 LCD1.34 LCD1.35 LCD1.36 LCD1.37 LCD1.38 LCD1.40 P11.5 P12.5

## Polygon pours and split planes (outlines as drawn)
GND on Top Layer "Layer-TOP" (solid, remove dead copper, pour order 0): 1044,5200 1044,1350 4944,1350 4944,5200 1044,5200
GND on Bottom Layer "Layer-BUTTOM" (solid, remove dead copper, pour order 2): 1044,5200 1044,1350 4944,1350 4944,5200 1044,5200

## Keep-outs
Keep-Out Layer:
  the board outline again, w10

## Silkscreen, mask and mechanical layers (free items; w line width, h text height)
Top Overlay:
  lines w10: 3594,1750 3594,2031 4094,2031 4094,1750 ; 3794,1750 3794,2031
  text "VEE2" at 4470,4870 h30
  text "GND" at 4480,4680 h30
  text "VEE1" at 4480,4460 h30
  text "GND" at 4490,4270 h30
  text "PB12" at 3470,3705 h30 r45
  text "PB13" at 3530,3705 h30 r45
  text "3V3" at 4614,3690 h30 r45
  text "GND" at 4674,3690 h30 r45
  text "PB14" at 3470,3605 h30 r45
  text "PB15" at 3530,3605 h30 r45
  text "3V3" at 4614,3590 h30 r45
  text "GND" at 4674,3590 h30 r45
  text "PD8" at 3470,3505 h30 r45
  text "PD9" at 3530,3505 h30 r45
  text "3V3" at 4614,3490 h30 r45
  text "GND" at 4674,3490 h30 r45
  text "PD10" at 3470,3405 h30 r45
  text "PD11" at 3530,3405 h30 r45
  text "PB10" at 4604,3390 h30 r45
  text "PB11" at 4664,3390 h30 r45
  text "PD12" at 3470,3305 h30 r45
  text "PD13" at 3530,3305 h30 r45
  text "PE14" at 4604,3290 h30 r45
  text "PE15" at 4664,3290 h30 r45
  text "PD14" at 3470,3205 h30 r45
  text "PD15" at 3530,3205 h30 r45
  text "PE12" at 4604,3190 h30 r45
  text "PE13" at 4664,3190 h30 r45
  text "PC6" at 3470,3105 h30 r45
  text "PC7" at 3530,3105 h30 r45
  text "PE10" at 4604,3090 h30 r45
  text "PE11" at 4664,3090 h30 r45
  text "PC8" at 3470,3005 h30 r45
  text "PC9" at 3530,3005 h30 r45
  text "PE8" at 4614,3000 h30 r45
  text "PE9" at 4674,3000 h30 r45
  text "PA8" at 3470,2905 h30 r45
  text "PA9" at 3530,2905 h30 r45
  text "PB2" at 4614,2900 h30 r45
  text "PE7" at 4674,2900 h30 r45
  text "PA10" at 3470,2805 h30 r45
  text "PA11" at 3530,2805 h30 r45
  text "PB0" at 4614,2800 h30 r45
  text "PB1" at 4684,2800 h30 r45
  text "PA12" at 3470,2705 h30 r45
  text "PA13" at 3530,2705 h30 r45
  text "PC4" at 4614,2700 h30 r45
  text "PC5" at 4674,2700 h30 r45
  text "PA14" at 3470,2605 h30 r45
  text "PA15" at 3530,2605 h30 r45
  text "PA6" at 4614,2600 h30 r45
  text "PA7" at 4674,2600 h30 r45
  text "PC10" at 3470,2505 h30 r45
  text "PC11" at 3530,2505 h30 r45
  text "PA4" at 4614,2500 h30 r45
  text "PA5" at 4674,2500 h30 r45
  text "PC12" at 3470,2405 h30 r45
  text "PD0" at 3530,2405 h30 r45
  text "PA2" at 4614,2400 h30 r45
  text "PA3" at 4674,2400 h30 r45
  text "PD1" at 3470,2305 h30 r45
  text "PD2" at 3530,2305 h30 r45
  text "PA0" at 4614,2300 h30 r45
  text "PA1" at 4684,2300 h30 r45
  text "PD3" at 3470,2205 h30 r45
  text "PD4" at 3530,2205 h30 r45
  text "PC2" at 4614,2200 h30 r45
  text "PC3" at 4674,2200 h30 r45
  text "PD5" at 3470,2105 h30 r45
  text "PD6" at 3530,2105 h30 r45
  text "PC0" at 4614,2100 h30 r45
  text "PC1" at 4684,2100 h30 r45
  text "PD7" at 3470,2005 h30 r45
  text "PB3" at 3530,2005 h30 r45
  text "PH0" at 4614,2000 h30 r45
  text "PH1" at 4684,2000 h30 r45
  text "PB4" at 3470,1905 h30 r45
  text "PB5" at 3530,1905 h30 r45
  text "PC14" at 4604,1900 h30 r45
  text "PC15" at 4664,1900 h30 r45
  text "PB6" at 3470,1805 h30 r45
  text "PB7" at 3530,1805 h30 r45
  text "PE6" at 4604,1800 h30 r45
  text "PC13" at 4664,1800 h30 r45
  text "PB8" at 3470,1705 h30 r45
  text "PB9" at 3530,1705 h30 r45
  text "PE4" at 4604,1700 h30 r45
  text "PE5" at 4674,1700 h30 r45
  text "PE0" at 3470,1605 h30 r45
  text "PE1" at 3530,1605 h30 r45
  text "PE2" at 4614,1600 h30 r45
  text "PE3" at 4674,1600 h30 r45
  text "KEYBOARD" at 1394,1530 h30
Bottom Overlay:
  lines w10: 4680.57,2433.21 4697,2416.79 4697,2317 4657,2277 ; 4657,2277 4671,2263 4671,2250 4671,2163 4654,2146 4569,2146 4555,2132 4555,2102 4543,2090 4358,2090 4346,2078 4346,2065 4329,2048 4247,2048 4231,2064 4231,2264 4244,2277 4657,2277